# Altium PCB PCB1.PcbDoc (part 2 of 2)
Units mm, origin at the board's own origin, x right, y up, seen from the top; angles counter-clockwise.
Board outline 135 x 104.39 mm, 2 copper layers (Top Layer, Bottom Layer); 68 components, 47 nets, 230 pads, 90 vias.
Unrouted connection lines stored in the file: 3.
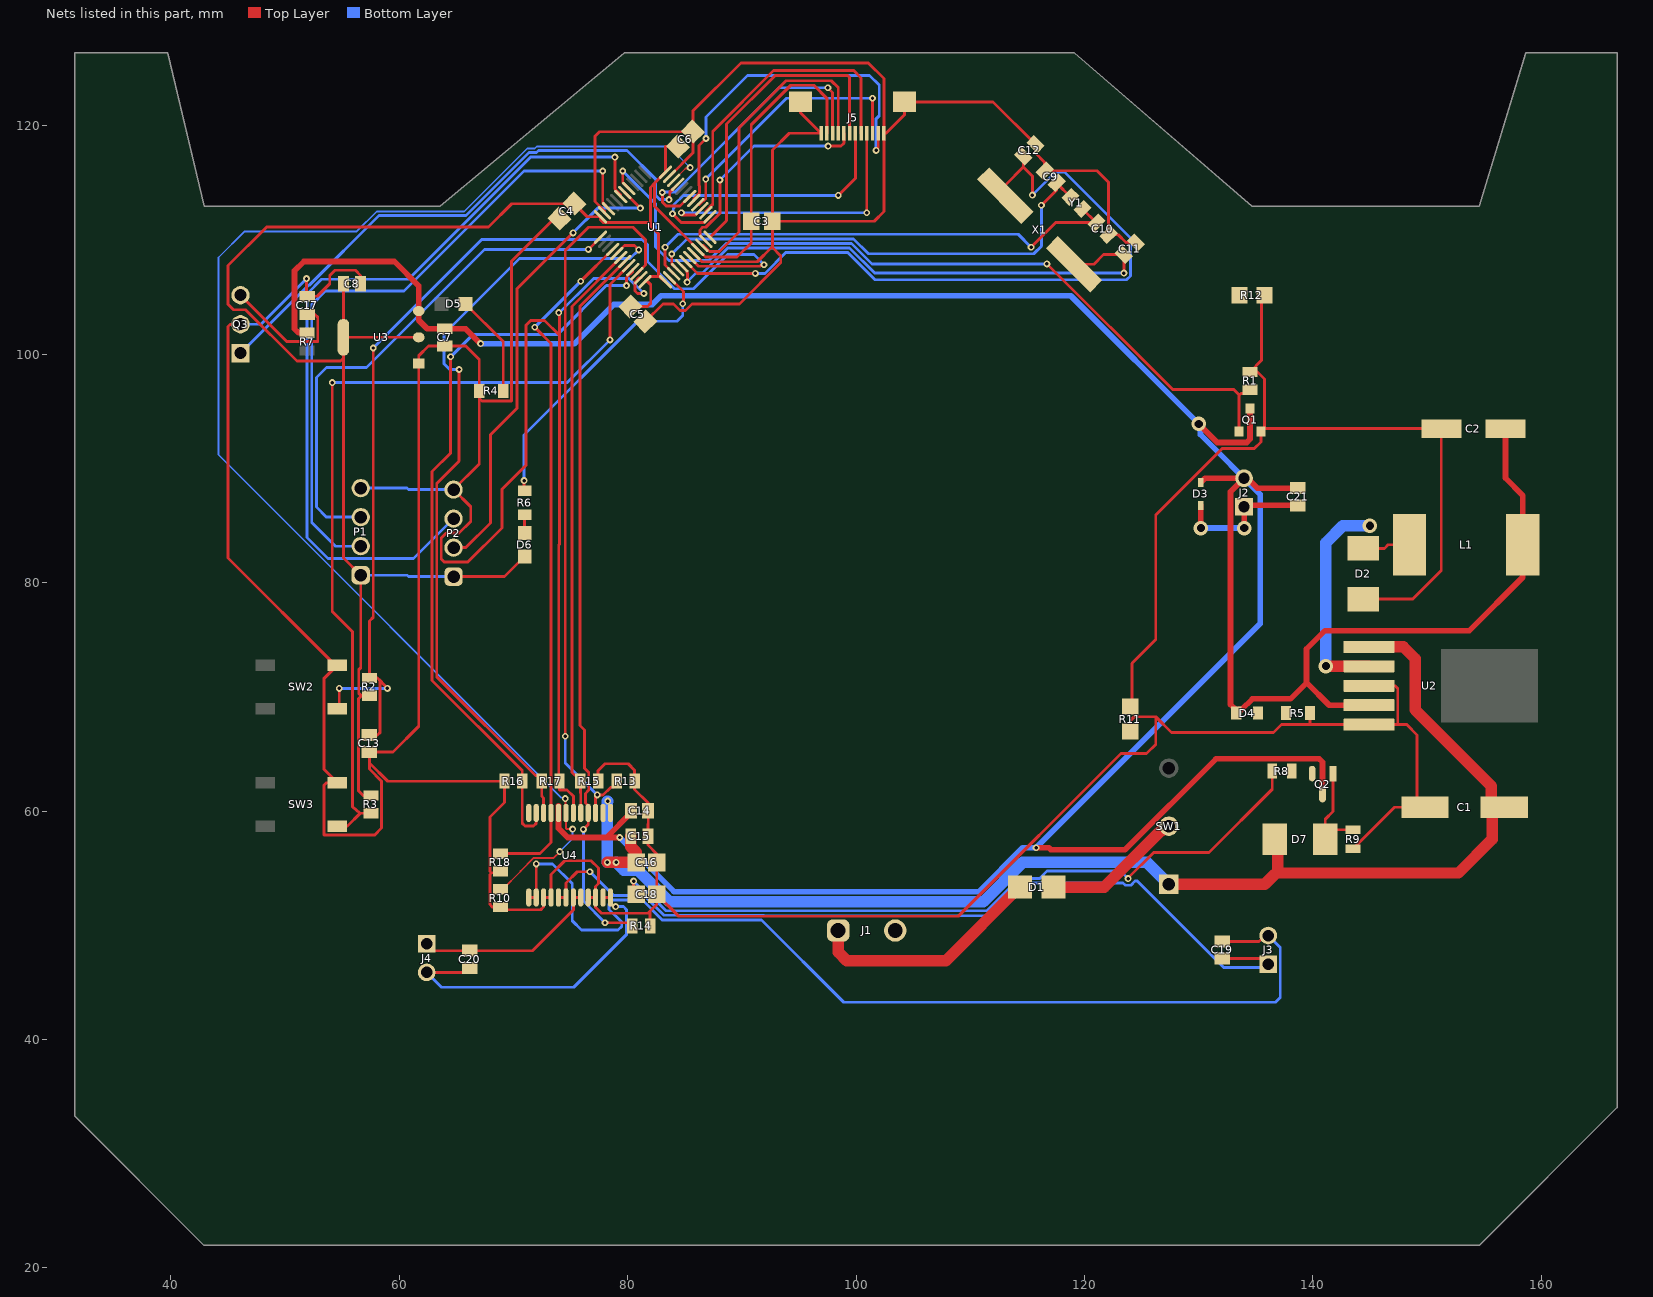
[diagram p2: the nets of this part, all layers, seen from the top]

## Via types
v1: diameter 0.6, hole 0.3, Top Layer to Bottom Layer, 64 vias
v2: diameter 5.2, hole 3.2, Top Layer to Bottom Layer, 19 vias
v3: diameter 1.27, hole 0.711, Top Layer to Bottom Layer, 6 vias
v4: diameter 42/42 (per signal layer), hole 40, Top Layer to Bottom Layer, 1 vias

## Nets (pads, with @x,y where several pads share a name; then routed paths per layer and width w, separated by ;. In a path a pad name is that pad's centre, name@x,y a point inside that pad or via, vN(x,y) a via of type N, cw(c..) or ccw(c..) an arc to the next point about the centre after c; other vN are vias at no path point)
12V-9V: D1.2 J1.1 | length 20.8
  Top Layer w1: J1.1@98.438,49.542 98.438,47.654 99.195,46.897 107.881,46.897 114.324,53.34 D1.2@114.374,53.34
+3V3: C3.2 C4.2 C5.2 C6.2 C8.2 D6.1 J5.11 P1.1 P2.1 R2.1 R3.1 U1.1 U1.9 U1.24 U1.36 U1.48 U3.2 U3.4 | length 179.9
  Top Layer w0.25: C8.2@55.13,106.172 55.13,103.815 55.125,103.81 U3.4@55.125,101.473 ; R2.1@57.404,70.09 56.693,70.09 ; R3.1@57.531,61.355 56.857,61.355 56.439,61.773 56.439,69.836 56.693,70.09 ; U3.2@61.715,101.473 U3.4@55.125,101.473 ; P2.1@64.77,80.518 69.228,80.518 D6.1@70.993,82.283 ; C5.2@80.245,104.159 81.745,104.159 82.03,104.445 82.03,106.07 81.766,106.334 U1.48@81.521,106.334 81.981,106.794 82.702,106.794 U1.1@83.325,106.334 82.702,106.957 82.702,110.541 82,111.243 ; C6.2@84.406,118.163 83.325,118.163 U1.24@83.325,115.916 82.369,114.96 ; J5.11@97.445,119.332 97.445,122.402 96.317,123.531 94.285,123.531 90.832,120.078 C3.2@90.832,111.636 90.832,109.728 89.592,108.488 86.827,108.488 U1.9@86.153,109.163 82.369,112.947 82.369,114.96 ; 55.125,99.651 55.125,82.162 P1.1@56.642,80.645 56.642,72.542 56.464,72.365 56.464,70.307 56.681,70.09 56.693,70.09 ; 55.125,99.651 54.864,99.39 51.054,99.39 46.558,103.886 45.517,103.886 45.034,104.369 45.034,107.747 48.412,111.125 67.818,111.125 69.86,113.167 C4.2@75.337,113.167 76.477,112.027 U1.36@77.632,112.027 77.632,111.76 77.886,111.506 81.737,111.506 82,111.243 ; 55.125,99.651 U3.4@55.125,101.473 ; 82,111.243 82,114.591 82.369,114.96
  Bottom Layer w0.25: P1.1@56.642,80.645 60.706,80.645 60.833,80.518 P2.1@64.77,80.518
A0: J5.9 U1.10 | length 27.9
  Top Layer w0.25: U1.10@86.507,109.516 86.648,109.516 87.173,108.991 88.062,108.991 89.764,110.693 89.764,119.816 93.878,123.931 97.839,123.931 98.445,123.325 J5.9@98.445,119.332
A1: J5.8 U1.11 | length 19.5
  Top Layer w0.25: U1.11@86.86,109.87 86.335,110.395 86.335,110.871 86.563,111.1 86.852,111.1 88.087,112.334 v1(88.087,115.24) ; v1(97.561,118.212) 98.691,118.212 98.945,118.466 J5.8@98.945,119.332
  Bottom Layer w0.25: v1(88.087,115.24) 91.059,118.212 v1(97.561,118.212)
A2: J5.7 U1.12 | length 28
  Top Layer w0.25: U1.12@87.214,110.223 88.671,111.681 88.671,120.142 92.926,124.397 99.276,124.397 99.445,124.227 J5.7@99.445,119.332
A3: J5.6 U1.13 | length 25.4
  Top Layer w0.25: v1(83.934,112.286) 84.714,111.506 86.693,111.506 U1.13@87.214,112.027 ; v1(98.45,113.894) 99.945,115.388 J5.6@99.945,119.332
  Bottom Layer w0.25: v1(83.934,112.286) 84.001,112.353 84.001,112.736 84.079,112.814 84.079,113.086 84.887,113.894 v1(98.45,113.894)
A4: J5.5 U1.14 | length 27.7
  Top Layer w0.25: U1.14@86.86,112.38 86.86,112.521 87.464,113.126 87.464,119.5 92.779,124.816 99.797,124.816 100.445,124.167 J5.5@100.445,119.332
A5: J5.4 U1.15 | length 25.4
  Top Layer w0.25: v1(84.709,112.37) 84.709,112.166 85.939,112.166 U1.15@86.507,112.734 ; v1(100.945,112.37) J5.4@100.945,119.332
  Bottom Layer w0.25: v1(84.709,112.37) v1(100.945,112.37)
A6: J5.3 U1.16 | length 23.2
  Top Layer w0.25: U1.16@86.153,113.087 86.294,113.087 86.843,113.635 v1(86.843,115.316) ; J5.3@101.445,119.332 v1(101.445,122.403)
  Bottom Layer w0.25: v1(86.843,115.316) 93.929,122.403 v1(101.445,122.403)
A7: J5.2 U1.17 | length 32.2
  Top Layer w0.25: U1.17@85.799,113.441 85.799,113.582 86.309,114.092 86.309,114.706 86.258,114.757 86.258,118.262 v1(86.868,118.872) ; v1(101.764,117.838) 101.764,117.933 101.945,118.113 J5.2@101.945,119.332
  Bottom Layer w0.25: v1(86.868,118.872) 86.868,120.752 90.5,124.384 101.194,124.384 102.032,123.546 102.032,120.873 101.764,120.605 v1(101.764,117.838)
AIN1: R18.1 U1.40 U4.21 | length 60.2
  Top Layer w0.25: R18.1@68.876,56.272 72.339,56.272 73.305,57.238 U4.21@73.305,59.834 73.305,100.929 v1(71.882,102.352) ; v1(75.908,106.378) U1.40@78.693,109.163
  Bottom Layer w0.25: v1(71.882,102.352) v1(75.908,106.378)
AIN2: R17.1 U1.41 U4.22 | length 70.4
  Top Layer w0.25: v1(65.253,98.654) 65.253,90.627 63.295,88.67 63.295,71.757 71.933,63.119 72.485,63.119 R17.1@72.485,62.613 72.485,61.308 72.655,61.138 U4.22@72.655,59.834 ; U1.41@79.047,108.809 79.737,109.499 80.594,109.499 v1(80.975,109.118)
  Bottom Layer w0.25: v1(65.253,98.654) 64.44,98.654 63.932,99.162 63.932,101.752 70.536,108.356 80.213,108.356 v1(80.975,109.118)
BIN1: R15.1 U1.42 U4.17 | length 50.8
  Top Layer w0.25: U4.17@75.905,59.834 75.905,61.562 75.874,61.592 75.874,62.815 75.546,63.143 75.344,63.143 75.124,63.363 75.124,104.18 U1.42@79.4,108.456
BIN2: R14.1 U1.43 U4.16 | length 63.7
  Top Layer w0.25: v1(76.133,58.395) 76.555,58.817 76.555,60.463 76.305,60.713 76.305,61.547 76.602,61.844 76.602,63.382 76.244,63.74 76.244,67.079 75.844,67.479 75.844,104.193 U1.43@79.754,108.102 ; v1(78.029,50.216) 80.426,50.216 R14.1@80.426,49.951
  Bottom Layer w0.25: v1(76.133,58.395) 76.133,52.112 v1(78.029,50.216)
BT0: R3.2 SW3.4 U1.44 | length 75.2
  Top Layer w0.25: v1(54.153,97.511) 54.153,77.47 55.931,75.692 55.931,60.362 56.598,59.803 ; SW3.4@54.585,58.679 55.474,58.679 56.598,59.803 ; R3.2@57.531,59.803 56.598,59.803 ; v1(78.46,101.245) 78.46,106.102 U1.44@80.107,107.749
  Bottom Layer w0.25: v1(54.153,97.511) 74.726,97.511 v1(78.46,101.245)
C13: R6.1 U1.2 | length 27
  Top Layer w0.25: v1(70.942,88.925) 70.942,88.045 R6.1@70.993,88.045 ; U1.2@83.678,106.688 84.887,105.479 84.887,104.456 v1(84.836,104.405)
  Bottom Layer w0.25: v1(70.942,88.925) 70.942,92.913 80.899,102.87 84.331,102.87 84.836,103.375 v1(84.836,104.405)
GND: C1.1 C2.2 C3.1 C4.1 C5.1 C6.1 C7.1 C8.1 C9.2 C10.2 C11.2 C12.2 C13.1 C14.1 C15.2 C16.1 C17.1 C18.1 D2.2 J1.2 J5.1 J5.12 J5.M1 J5.M2 P1.4 P2.4 Q1.2 Q3.2 R1.2 R4.1 R5.1 R9.2 R10.2 R11.1 R11.2 R12.1 R12.2 R13.2 R14.2 R15.2 R16.2 R17.2 R18.2 SW2.2 SW3.2 U1.8 U1.23 U1.35 U1.47 U2.3 U2.5 U3.1 U4.3 U4.4 U4.9 U4.10 U4.18 | length 642.7
  Top Layer w0.25: Q3.2@46.121,102.616 45.237,102.616 45.034,102.413 45.034,82.139 54.407,72.766 SW2.2@54.585,72.766 53.442,71.623 53.442,63.622 SW3.2@54.585,62.479 53.645,62.479 53.442,62.276 53.442,57.887 57.836,57.887 58.471,58.522 58.471,62.611 57.404,63.678 57.404,64.211 ; v1(51.892,106.604) 51.892,105.067 C17.1@51.943,105.067 52.832,105.067 53.924,106.159 53.924,106.883 54.381,107.34 56.173,107.34 56.63,106.883 C8.1@56.63,106.172 ; R10.2@68.876,51.604 R10.2@68.859,51.604 ; R18.2@68.876,54.72 68.076,54.589 ; R16.2@69.233,62.613 R16.2@69.233,62.611 ; v1(73.974,103.628) 74.037,103.565 74.037,101.651 ; C4.1@74.029,111.858 73.584,111.858 69.85,108.125 69.85,95.885 67.251,95.885 67.022,96.114 ; U4.18@75.255,59.834 75.255,61.29 74.696,61.849 74.037,61.849 R17.2@74.037,62.613 73.974,62.676 73.974,83.292 74.037,83.355 74.037,101.651 ; U4.9@76.555,52.434 U4.10@77.205,52.434 ; R15.2@77.427,62.613 77.427,63.533 78.029,64.135 80.061,64.135 80.619,63.577 R13.2@80.619,62.613 80.619,61.896 81.809,60.706 C14.1@81.809,60.014 81.809,58.91 81.776,58.877 C15.2@81.776,57.785 81.776,57.021 82.561,56.236 C16.1@82.561,55.499 C18.1@82.561,52.705 ; U1.35@77.986,112.38 77.986,112.521 77.143,113.364 77.143,119.068 77.546,119.471 C6.1@85.714,119.471 ; U1.47@81.168,106.688 81.027,106.688 80.662,106.323 80.662,105.52 80.874,105.308 v1(81.432,105.308) ; C5.1@81.553,102.851 83.096,104.394 84.034,104.394 84.598,103.83 85.074,103.83 85.638,104.394 89.789,104.394 93.412,108.017 93.412,108.601 92.682,109.331 ; R14.2@81.978,49.951 81.978,51.244 ; U1.23@83.678,115.562 85.742,117.626 85.742,118.58 85.75,118.588 85.75,119.436 C6.1@85.714,119.471 ; U1.8@85.799,108.809 86.52,108.088 91.356,108.088 92.599,109.331 92.682,109.331 ; J5.M2@95.145,122.082 95.123,122.082 95.123,121.154 J5.12@96.945,119.332 94.158,119.332 92.682,117.856 C3.1@92.682,111.636 ; 124.005,67.643 124.005,67.893 124.361,68.25 126.238,68.25 ; R11.2@124.155,69.143 124.155,72.931 126.238,75.014 126.238,85.928 132.055,91.745 134.869,91.745 135.443,92.319 Q1.2@135.443,93.234 Q1.2@135.681,93.472 ; C11.2@124.509,109.766 123.645,109.766 122.961,110.45 C10.2@122.112,110.45 122.112,115.043 121.107,116.047 C9.2@116.515,116.047 116.515,116.789 115.707,117.597 C12.2@115.707,118.375 112,122.082 J5.M1@104.245,122.082 104.245,120.955 102.619,119.329 J5.1@102.445,119.329 ; R12.2@135.509,105.156 135.509,99.455 R1.2@134.493,98.439 135.15,98.439 135.762,97.827 135.762,93.553 Q1.2@135.681,93.472 ; R5.1@139.734,68.58 139.734,67.58 139.75,67.564 ; R9.2@143.51,56.704 147.131,60.325 C1.1@149.123,60.325 ; D2.2@144.399,78.552 148.732,78.552 151.232,81.051 C2.2@151.232,93.472 ; U2.3@144.907,70.964 147.171,70.964 147.422,70.714 147.422,67.564 ; C1.1@149.814,60.325 C1.1@149.123,60.325 ; C2.2@151.251,93.472 C2.2@151.232,93.472 ; 57.404,64.211 C13.1@57.404,65.163 59.461,65.163 61.715,67.417 U3.1@61.715,99.183 61.715,99.852 62.586,100.723 C7.1@64.008,100.723 65.837,100.723 67.022,99.538 R4.1@67.022,96.774 67.022,96.114 ; 57.404,64.211 59.004,62.611 R16.2@69.233,62.611 ; 67.022,96.114 67.022,90.39 P2.4@64.77,88.138 66.269,86.639 66.269,85.344 65.253,84.328 64.135,84.328 63.695,83.888 63.695,82.05 63.957,81.788 66.015,81.788 69.012,84.785 69.012,88.163 71.095,90.246 71.095,102.514 71.526,102.946 72.742,102.946 74.037,101.651 ; 68.076,54.589 67.945,54.458 67.945,51.816 68.157,51.604 R10.2@68.859,51.604 ; 68.076,54.589 67.945,54.72 67.945,59.469 69.233,60.757 R16.2@69.233,62.611 ; R10.2@68.859,51.604 68.859,51.359 72.401,51.359 72.655,51.613 U4.3@72.655,52.434 U4.4@73.305,52.434 73.305,54.458 74.499,55.651 76.81,55.651 77.457,55.004 77.457,53.645 77.205,53.393 U4.10@77.205,52.434 ; U4.10@77.205,52.434 77.205,51.573 77.723,51.055 81.789,51.055 81.978,51.244 ; 81.978,51.244 82.561,51.827 C18.1@82.561,52.705 ; C18.1@82.561,52.705 84.477,50.789 97.632,50.789 97.635,50.792 99.241,50.792 99.244,50.789 108.955,50.789 123.19,65.024 125.425,65.024 126.238,65.837 126.238,68.25 ; C6.1@85.714,119.471 85.714,121.285 89.926,125.497 101.071,125.497 102.445,124.123 J5.1@102.445,119.332 J5.1@102.445,119.329 ; 92.682,109.331 C3.1@92.682,111.636 ; C3.1@92.682,111.636 101.6,111.636 102.445,112.481 J5.1@102.445,119.329 ; 126.238,68.25 127.61,66.878 136.55,66.878 137.236,67.564 139.75,67.564 ; Q1.2@135.681,93.472 C2.2@151.232,93.472 ; 139.75,67.564 U2.5@144.907,67.564 147.422,67.564 ; 147.422,67.564 148.209,67.564 149.123,66.65 C1.1@149.123,60.325
  Bottom Layer w0.25: Q3.2@46.121,102.616 47.904,102.616 v1(51.892,106.604) ; P1.4@56.642,88.265 60.706,88.265 60.833,88.138 P2.4@64.77,88.138 ; v1(73.974,103.628) 74.037,103.628 77.013,106.604 80.137,106.604 v1(81.432,105.308)
IR: J5.10 U1.18 | length 26.2
  Top Layer w0.25: v1(83.038,114.144) 83.056,114.126 83.056,113.291 83.393,112.954 84.606,112.954 U1.18@85.446,113.794 ; v1(97.536,123.317) 97.945,122.908 J5.10@97.945,119.332
  Bottom Layer w0.25: v1(83.038,114.144) 83.092,114.198 84.151,114.198 93.269,123.317 v1(97.536,123.317)
IR-INT: Q3.1 U1.21 | length 49.1
  Top Layer w0.25: v1(83.631,113.529) 83.698,113.596 83.698,114.168 U1.21@84.385,114.855
  Bottom Layer w0.25: Q3.1@46.121,100.076 52.074,106.029 52.13,106.029 58.242,112.14 65.854,112.14 71.361,117.646 72.027,117.646 72.202,117.821 79.947,117.821 82.463,115.305 82.463,113.884 82.812,113.536 83.625,113.536 v1(83.631,113.529)
M-PWM-ON/OFF: Q1.1 R1.1 U1.29 | length 71.6
  Top Layer w0.25: v1(79.578,116.027) 79.578,115.03 U1.29@80.107,114.501 ; v1(116.713,107.899) 127.725,96.887 133.069,96.887 133.543,96.412 ; Q1.1@133.543,93.234 133.543,96.412 ; R1.1@134.493,96.887 134.165,96.559 133.689,96.559 133.543,96.412
  Bottom Layer w0.25: v1(79.578,116.027) 82.448,113.157 82.448,109.372 83.633,108.188 87.111,108.188 88.611,109.687 99.61,109.687 101.398,107.899 v1(116.713,107.899)
NetC17_2: C17.2 Q3.3 | length 11.6
  Top Layer w0.25: Q3.3@46.121,105.156 50.16,101.117 52.883,101.117 52.883,103.226 52.641,103.467 C17.2@51.943,103.467
NetC18_2: C18.2 R8.2 | length 64.8
  Top Layer w0.25: v1(80.524,53.865) 80.524,52.942 C18.2@80.761,52.705 ; v1(123.822,54.08) 123.822,54.124 126.06,56.363 130.899,56.363 136.436,61.9 R8.2@136.436,63.5
  Bottom Layer w0.25: v1(80.524,53.865) 81.385,53.005 81.632,53.005 83.366,51.271 111.458,51.271 114.289,54.102 116.086,54.102 116.724,54.74 123.162,54.74 v1(123.822,54.08)
NetC19_1: C19.1 J3.1 U4.5 U4.6 | length 74.3
  Top Layer w0.25: U4.5@73.955,52.434 U4.6@74.605,52.434 74.605,53.701 75.59,54.686 v1(76.708,54.686) ; C19.1@132.065,47.093 135.595,47.093 J3.1@136.088,46.6
  Bottom Layer w0.25: v1(76.708,54.686) 78.789,52.605 81.467,52.605 83.201,50.871 91.884,50.871 91.928,50.827 112.245,50.827 115.121,53.702 123.386,53.702 123.583,53.505 124.06,53.505 124.415,53.861 124.622,53.861 132.194,46.289 135.778,46.289 J3.1@136.088,46.6
NetC19_2: C19.2 J3.2 U4.1 U4.2 | length 90.8
  Top Layer w0.25: U4.1@71.355,52.434 U4.2@72.005,52.434 v1(72.005,55.372) ; C19.2@132.065,48.593 135.292,48.593 135.799,49.1 J3.2@136.088,49.1
  Bottom Layer w0.25: v1(72.005,55.372) 73.431,55.372 75.159,53.645 75.159,50.394 75.971,49.581 79.172,49.581 79.493,49.902 79.493,50.275 78.376,51.392 78.376,51.868 78.713,52.205 81.301,52.205 83.035,50.471 91.718,50.471 98.933,43.256 136.717,43.256 137.138,43.678 137.138,48.05 J3.2@136.088,49.1
NetC20_1: C20.1 J4.1 U4.7 U4.8 | length 16.3
  Top Layer w0.25: J4.1@62.415,48.375 63.016,47.773 C20.1@66.196,47.773 71.67,47.773 75.255,51.359 U4.7@75.255,52.434 U4.8@75.905,52.434
NetC20_2: C20.2 J4.2 U4.11 U4.12 | length 28.8
  Top Layer w0.25: J4.2@62.415,45.875 65.797,45.875 C20.2@66.196,46.273 ; U4.11@77.855,52.434 U4.12@78.505,52.434 78.505,51.913 78.721,51.697 78.884,51.697 v1(78.951,51.63)
  Bottom Layer w0.25: J4.2@62.415,45.875 63.713,44.577 75.296,44.577 79.893,49.174 79.893,51.374 79.637,51.63 v1(78.951,51.63)
NetC21_2: C21.2 D3.2 J2.1 | length 12.4
  Top Layer w0.5: D3.2@130.175,86.757 130.175,84.79 v3(130.193,84.772) ; v3(133.982,84.763) 133.982,86.62 J2.1@133.968,86.634 134.099,86.765 C21.2@138.684,86.765
  Bottom Layer w0.5: v3(130.193,84.772) 130.197,84.768 133.978,84.768 v3(133.982,84.763)
NetD1_1: D1.1 SW1.2 | length 12.3
  Top Layer w1: D1.1@117.274,53.34 121.738,53.34 126.722,58.324 126.842,58.324 127.192,58.674 SW1.2@127.381,58.674
NetD2_1: D2.1 L1.1 U2.2 | length 23.3
  Top Layer w0.25: D2.1@144.399,82.992 146.253,82.992 146.573,83.312 L1.1@148.466,83.312
  Top Layer w1: v3(141.133,72.688) 141.145,72.676 144.895,72.676 U2.2@144.907,72.664
  Bottom Layer w1: v3(141.133,72.688) 141.133,83.488 142.616,84.971 v3(144.992,84.971)
  other v3: 144.992,84.971
NetD4_1: D4.1 R5.2
NetD5_1: D5.1 R4.2 | length 9
  Top Layer w0.25: D5.1@65.82,104.394 69.122,101.092 R4.2@69.122,96.774
NetD6_2: D6.2 R6.2 | length 1.6
  Top Layer w0.25: D6.2@70.993,84.341 R6.2@70.993,85.945
NetD7_2: D7.2 Q2.1 R9.1 | length 8.8
  Top Layer w0.25: Q2.1@141.758,63.284 141.758,59.97 141.072,59.284 D7.2@141.072,57.531 141.899,58.358 R9.1@143.51,58.358
osc32_in: C10.1 U1.3 Y1.1 | length 43.9
  Top Layer w0.25: v1(83.287,109.358) 83.287,107.787 U1.3@84.032,107.041 ; v1(115.327,109.358) 117.475,111.506 121.051,111.506 C10.1@121.051,111.511 121.033,111.511 119.837,112.707 Y1.1@119.827,112.707
  Bottom Layer w0.25: v1(83.287,109.358) 84.415,110.487 114.199,110.487 v1(115.327,109.358)
osc32_out: C9.1 U1.4 Y1.2 | length 43.1
  Top Layer w0.25: v1(83.871,108.763) 83.871,107.909 U1.4@84.385,107.395 ; v1(116.23,113.03) 117.576,114.375 C9.1@117.576,114.957 ; C9.1@117.576,114.987 C9.1@117.576,114.957 ; Y1.2@118.766,113.767 C9.1@117.576,114.957
  Bottom Layer w0.25: v1(83.871,108.763) 85.195,110.087 99.776,110.087 101.079,108.783 115.565,108.783 116.23,109.448 v1(116.23,113.03)
osc_in: C11.1 U1.5 X1.1 | length 48.4
  Top Layer w0.25: U1.5@84.739,107.749 85.198,107.289 85.198,107.148 85.245,107.101 85.245,106.327 v1(85.217,106.299) ; X1.1@119.083,107.866 120.828,107.866 121.668,108.706 C11.1@123.449,108.706 v1(123.449,107.086)
  Bottom Layer w0.25: v1(85.217,106.299) 86.004,107.086 86.576,107.086 88.776,109.287 99.444,109.287 101.645,107.086 v1(123.449,107.086)
osc_out: C12.1 U1.6 X1.2 | length 65.2
  Top Layer w0.25: U1.6@85.092,108.102 86.133,107.061 v1(91.186,107.061) ; C12.1@114.646,117.315 114.646,116.382 ; X1.2@114.678,113.154 113.795,113.154 X1.2@113.073,113.876 113.073,114.808 114.646,116.382 ; v1(115.443,113.919) 115.443,115.57 114.646,116.367 114.646,116.382
  Bottom Layer w0.25: v1(91.186,107.061) 92.027,107.061 93.853,108.887 99.279,108.887 101.654,106.511 123.687,106.511 124.024,106.848 124.024,110.164 118.237,115.951 117.475,115.951 v1(115.443,113.919)
out_fb: C2.1 C7.2 C14.2 C21.1 D3.1 D4.2 J2.2 L1.2 Q1.3 Q2.3 R7.1 U2.4 U3.3 U4.20 | length 316.6
  Top Layer w0.5: R7.1@51.943,101.868 51.192,101.868 50.851,102.21 50.851,107.29 51.664,108.102 59.588,108.102 61.715,105.976 U3.3@61.715,103.763 61.715,102.972 62.464,102.223 C7.2@64.008,102.223 65.823,102.223 v1(67.132,100.914) ; U4.20@73.955,60.452 U4.20@73.955,59.834 73.955,58.486 74.758,57.683 78.15,57.683 ; v1(79.323,57.683) 78.15,57.683 ; C14.2@80.309,60.014 80.309,59.842 78.15,57.683 ; v1(115.76,56.781) 116.887,56.781 117.06,56.608 123.547,56.608 131.505,64.566 140.559,64.566 140.843,64.282 Q2.3@140.843,61.43 ; v3(130.004,93.883) 131.617,92.27 134.2,92.27 134.493,92.563 Q1.3@134.493,95.234 ; D3.1@130.175,88.757 130.552,89.134 J2.2@133.968,89.134 ; C21.1@138.684,88.265 135.121,88.265 134.252,89.134 J2.2@133.968,89.134 ; U2.4@144.907,69.264 141.427,69.264 139.436,71.255 ; C2.1@156.851,93.472 156.851,89.145 158.366,87.63 L1.2@158.366,83.312 158.366,80.467 153.692,75.794 141.051,75.794 139.436,74.179 139.436,71.255 ; J2.2@133.968,89.134 132.791,87.957 132.791,69.317 133.289,68.819 D4.2@133.289,68.58 133.289,68.68 133.489,68.88 133.758,68.88 134.697,69.819 138.036,69.819 139.436,71.219 139.436,71.255
  Bottom Layer w0.5: v1(67.132,100.914) 75.362,100.914 78.785,104.338 82.155,104.338 82.923,105.105 118.796,105.105 130.151,93.75 130.151,92.951 135.382,87.72 135.382,76.403 v1(115.76,56.781) ; v1(79.323,57.683) 84.06,52.946 110.764,52.946 114.599,56.781 v1(115.76,56.781)
PWMA: R16.1 U1.45 U4.23 | length 66.7
  Top Layer w0.25: v1(64.516,99.771) 64.516,91.331 62.895,89.71 62.895,71.441 70.785,63.551 R16.1@70.785,62.613 70.785,58.928 71.014,58.699 71.776,58.699 72.005,58.928 U4.23@72.005,59.834 ; v1(79.908,105.994) 79.908,106.701 80.461,107.254 U1.45@80.461,107.395
  Bottom Layer w0.25: v1(64.516,99.771) 66.446,101.702 73.85,101.702 78.142,105.994 v1(79.908,105.994)
PWMB: R13.1 U1.46 U4.15 | length 64.4
  Top Layer w0.25: v1(74.549,66.548) 74.549,109.068 76.581,111.1 80.467,111.1 81.559,110.007 81.559,107.787 U1.46@80.814,107.041 ; U4.15@77.205,59.834 77.205,61.275 v1(77.343,61.413) ; v1@77.357,61.399 77.853,61.399 78.537,62.083 78.739,62.083 79.067,62.411 R13.1@79.067,62.613
  Bottom Layer w0.25: v1(74.549,66.548) 74.549,64.207 v1(77.343,61.413)
RST: C13.2 R2.2 SW2.4 U1.7 | length 92.3
  Top Layer w0.25: SW2.4@54.585,68.966 54.762,68.966 v1(54.762,70.739) ; C13.2@57.404,66.663 58.115,66.663 58.344,66.892 58.344,71.403 ; v1(57.734,100.533) 57.734,76.962 57.404,76.632 R2.2@57.404,71.642 58.115,71.642 ; v1(58.979,70.739) 58.344,71.403 ; U1.7@85.446,108.456 86.213,107.688 91.566,107.688 91.634,107.756 91.881,107.756 v1(91.948,107.823) ; 58.115,71.642 58.344,71.413 58.344,71.403 ; 58.115,71.642 58.344,71.403
  Bottom Layer w0.25: v1(54.762,70.739) v1(58.979,70.739) ; v1(57.734,100.533) 67.234,110.033 81.28,110.033 81.737,109.576 81.737,108.102 84.116,105.724 85.779,105.724 88.767,108.712 91.059,108.712 v1(91.948,107.823)
RX: P2.3 U1.31 | length 72
  Top Layer w0.25: v1(78.892,117.246) 78.892,114.443 79.4,113.936 U1.31@79.4,113.794
  Bottom Layer w0.25: P2.3@64.77,85.598 61.265,82.093 53.784,82.093 51.943,83.934 51.943,105.276 53.22,106.553 60.833,106.553 71.526,117.246 v1(78.892,117.246)
STBY: R10.1 U1.22 U4.19 | length 120.2
  Top Layer w0.15: R10.1@68.876,53.156 69.078,53.156 70.634,54.712 70.634,54.744 71.788,55.897 73.55,55.897 v1@74.041,56.388 ; v1(74.549,61.087) 74.577,61.059 74.577,59.862 U4.19@74.605,59.834 74.605,58.508 74.693,58.42 v1(75.184,58.42) ; U1.22@84.032,115.209 85.069,116.246 85.385,116.246 v1(85.471,116.332)
  Bottom Layer w0.15: v1(74.07,56.453) 75.184,57.567 v1(75.184,58.42) ; v1(74.549,61.087) 74.463,61.173 74.209,61.173 44.196,91.186 44.196,108.458 46.479,110.741 56.291,110.741 58.04,112.49 65.709,112.49 71.216,117.996 71.882,117.996 72.057,118.171 83.632,118.171 v1(85.471,116.332)
SW_12V-9V: C1.2 C15.1 C16.2 D7.1 Q2.2 R8.1 SW1.1 U2.1 U4.13 U4.14 U4.24 | length 119.9
  Top Layer w1: v1(78.232,55.499) v1(78.994,55.499) C16.2@80.761,55.499 80.761,56.388 80.276,56.873 C15.1@80.276,57.785 ; SW1.1@127.381,53.594 135.788,53.594 136.652,54.458 ; D7.1@136.652,57.531 136.915,57.268 136.915,54.576 152.733,54.576 155.702,57.546 155.702,59.875 156.152,60.325 C1.2@156.764,60.325 156.066,60.325 155.616,60.775 155.616,62.189 148.946,68.859 148.946,73.348 147.93,74.364 U2.1@144.907,74.364
  Bottom Layer w1: v1(78.232,55.499) 78.232,60.841 v1(78.264,60.872) ; v1(78.994,55.499) 79.678,54.815 80.918,54.815 83.687,52.046 111.137,52.046 114.605,55.515 125.46,55.515 SW1.1@127.381,53.594
SWCLK: P1.3 U1.37 | length 45.5
  Top Layer w0.25: v1(76.578,109.169) U1.37@77.632,110.223
  Bottom Layer w0.25: P1.3@56.642,85.725 53.645,85.725 52.756,86.614 52.756,97.942 53.645,98.831 57.15,98.831 67.488,109.169 v1(76.578,109.169)
SWDIO: P1.2 U1.34 | length 58
  Top Layer w0.25: v1(77.826,116.027) 77.826,113.247 U1.34@78.339,112.734
  Bottom Layer w0.25: P1.2@56.642,83.185 54.432,83.185 52.349,85.268 52.349,104.318 53.543,105.512 60.427,105.512 70.942,116.027 v1(77.826,116.027)
TX: P2.2 U1.30 | length 41.2
  Top Layer w0.25: P2.2@64.77,83.058 65.837,83.058 67.996,85.217 67.996,92.939 70.307,95.25 70.307,105.689 v1(75.235,110.617) ; U1.30@79.754,114.148 v1(81.127,112.775)
  Bottom Layer w0.25: v1(75.235,110.617) 77.393,112.775 v1(81.127,112.775)
pads on no net: D5.2 R7.2 SW1.3 SW2.1 SW2.3 SW3.1 SW3.3 U1.19 U1.20 U1.25 U1.26 U1.27 U1.28 U1.32 U1.33 U1.38 U1.39 U2.6
copper on no net:
  other v2: 143.771,35.655 163.398,35.655 34.945,35.697 55.183,35.697 34.798,54.74 163.25,54.74 100.965,58.714 79.648,95.765 122.377,95.765 36.331,100.824 161.456,100.914 36.331,106.829 161.456,106.918 36.331,112.833 161.456,112.922 36.331,118.837 161.456,118.927 81.109,122.699 117.212,122.699
  other v4: 100.965,83.693

## Polygon pours and split planes (outlines as drawn)
GND on Bottom Layer "GND_L02_P013" (solid, pour order 13): 30.607,59.059 39.207,50.459 72.858,50.459 73.889,51.49 73.874,51.505 73.874,55.038 77.63,58.794 77.63,60.817 78.333,61.521 91.607,61.521 97.98,67.893 137.997,67.893 139.284,69.18 161.964,69.18 167.064,74.28 167.064,33.271 166.56,33.271 154.461,21.173 154.262,21.372 42.686,21.372 42.686,21.746 30.607,33.825 30.607,59.059
A5 on Bottom Layer "A5_L02_P017" (solid, pour order 17): 98.117,68.03 137.697,68.03 139.03,69.363 161.859,69.363 167.064,74.568 167.064,126.891 166.725,127.23 158.307,127.23 144.449,113.371 144.449,113.356 134.836,113.356 134.836,104.75
GND on Bottom Layer "GND_L02_P004" (solid, pour order 4): 134.643,113.447 119.601,128.488 118.839,127.726 76.421,127.726 62.705,114.01 43.528,114.01 43.528,124.297 39.083,128.742 38.702,128.361 30.574,128.361 30.574,59.527 39.337,50.764 72.738,50.764 73.627,51.653 73.627,55.209 77.437,59.019 77.437,61.108 78.162,61.833 78.181,61.813 91.534,61.813 134.643,104.922
GND on Top Layer "GND_L01_P010" (solid, pour order 10): 30.757,59.059 39.357,50.459 73.006,50.459 74.024,51.477 74.024,55.038 77.78,58.794 77.78,60.817 78.483,61.521 91.757,61.521 97.799,67.563 137.96,67.893 139.434,69.18 140.334,69.18 162.114,69.18 167.214,74.28 167.214,33.271 166.71,33.271 154.611,21.173 154.412,21.372 42.836,21.372 42.836,21.746 30.757,33.825
GND on Top Layer "GND_L01_P016" (solid, pour order 16): 98.117,68.03 137.692,68.03 139.025,69.363 161.859,69.363 167.064,74.568 167.064,126.891 166.725,127.23 158.368,127.23 156.308,120.544 154.061,113.356 134.836,113.356 134.836,104.75
GND on Top Layer "GND_L01_P000" (solid, pour order 0): 134.675,113.356 119.634,128.397 118.872,127.635 76.454,127.635 62.738,113.919 43.561,113.919 43.561,124.206 39.116,128.651 38.735,128.27 30.607,128.27 30.607,59.436 39.37,50.673 72.771,50.673 73.66,51.562 73.66,55.118 77.47,58.928 77.47,61.016 78.195,61.741 78.214,61.722 91.567,61.722 134.675,104.83
no net on Top Layer "NONET_L01_P008" (solid, pour order 8): 30.607,59.436 39.37,50.673 72.771,50.673 73.66,51.562 73.66,55.118 77.47,58.928 77.47,61.016 77.509,61.016 78.214,61.722 91.567,61.722 93.576,63.731
out_fb on Top Layer "OUT_FB_L01_P007" (solid, pour order 7): 129.925,89.217 132.111,91.403 138.888,91.403 139.359,90.932 139.359,87.74 130.178,87.74 129.92,87.997 129.925,88.002

## Other copper
Top Layer:
  rectangle net out_fb: 155.684,85.214 159.816,94.272
  rectangle net out_fb: 155.101,80.612 156.916,94.272
  rectangle net NetD2_1: 143.004,84.072 149.916,86.012
  rectangle net NetD2_1: 143.004,80.612 149.916,84.072
  rectangle net NetD4_1: 134.739,67.98 138.084,69.13
  rectangle net SW_12V-9V: 137.256,56.02 138.972,64.166
  rectangle net SW_12V-9V: 137.735,62.512 140.406,64.154
  rectangle net SW_12V-9V: 154.535,57.007 159.074,62.558

## Silkscreen, mask and mechanical layers (free items; w line width, h text height)
Top Overlay:
  lines w0.254: 37.719,78.359 53.594,78.359 53.594,91.694 37.719,91.694 37.719,78.359 ; 38.608,68.58 46.736,68.58 46.736,71.628 38.608,71.628 38.608,68.58 ; 38.862,58.293 45.593,58.293 45.593,61.341 38.862,61.341 38.862,58.293 ; 59.046,38.66 70.984,38.66 70.984,42.47 59.046,42.47 59.046,38.66 ; 95.904,35.999 105.937,35.999 105.937,45.778 95.904,45.778 95.904,35.999 ; 119.38,51.308 123.19,51.308 123.19,66.04 119.38,66.04 119.38,51.308 ; 127.67,79.252 127.67,82.3 139.608,82.3 139.608,79.252 127.67,79.252 ; 127.921,38.767 139.605,38.767 139.605,41.942 127.921,41.942 127.921,38.767
  text "STLINK" at 37.846,92.583 h1.52
  text "UART" at 48.133,92.456 h1.52
  text "GND" at 39.497,89.154 h1.52
  text "GND" at 48.133,89.154 h1.52
  text "TX" at 48.768,86.233 h1.52
  text "SWCLK" at 38.608,85.979 h1.52
  text "RX" at 48.895,83.185 h1.52
  text "SWDIO" at 38.862,83.058 h1.52
  text "3V3" at 39.751,80.264 h1.52
  text "3V3" at 48.133,80.264 h1.52
  text "EXHAUST" at 128.686,80.014 h1.52
  text "RESET" at 39.116,69.469 h1.52
  text "OFF" at 122.047,60.452 h1.52 r90
  text "BOOT" at 39.497,59.055 h1.52
  text "ON" at 122.047,53.848 h1.52 r90
  text "12V-9V" at 97.428,45.143 h1.52 r270
  text "GND" at 102.635,42.857 h1.52 r270
  text "MOTOR B" at 60.048,39.79 h1.52
  text "MOTOR A" at 128.615,39.79 h1.52

## Text inside footprints (layer, text, board x,y; h text height)
C2: Top Overlay "+" at 158.901,92.972 h1.22